# EAGLE board file-1764345413433-731153713 (EAGLE 9.7.0)
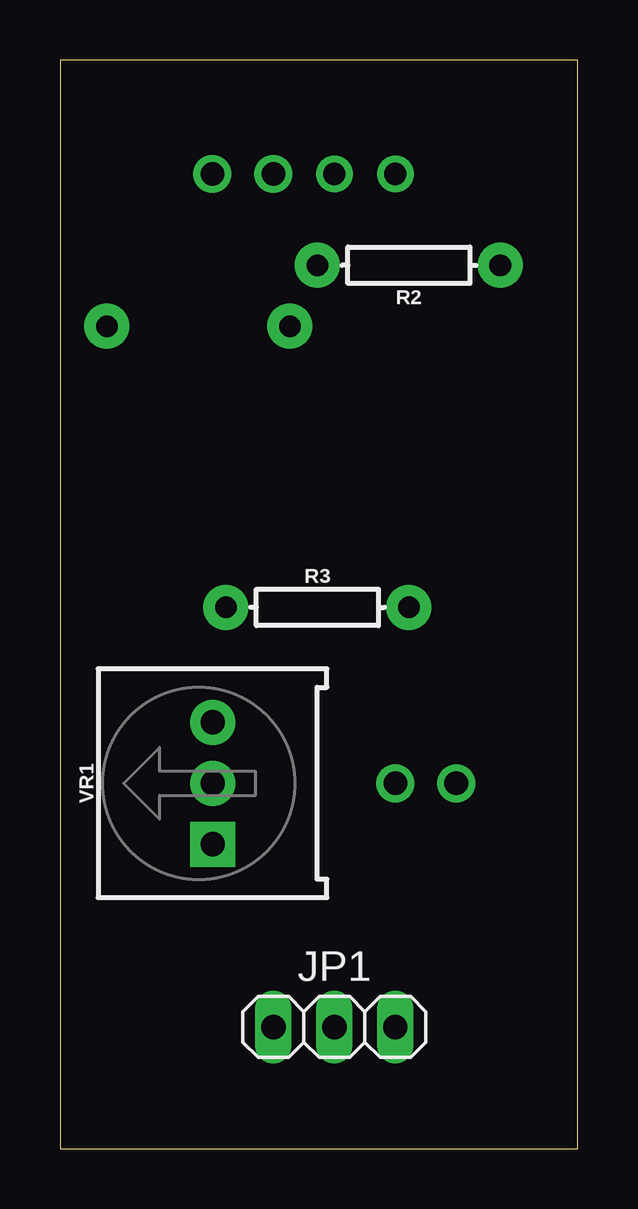
[diagram p0: board, top side]
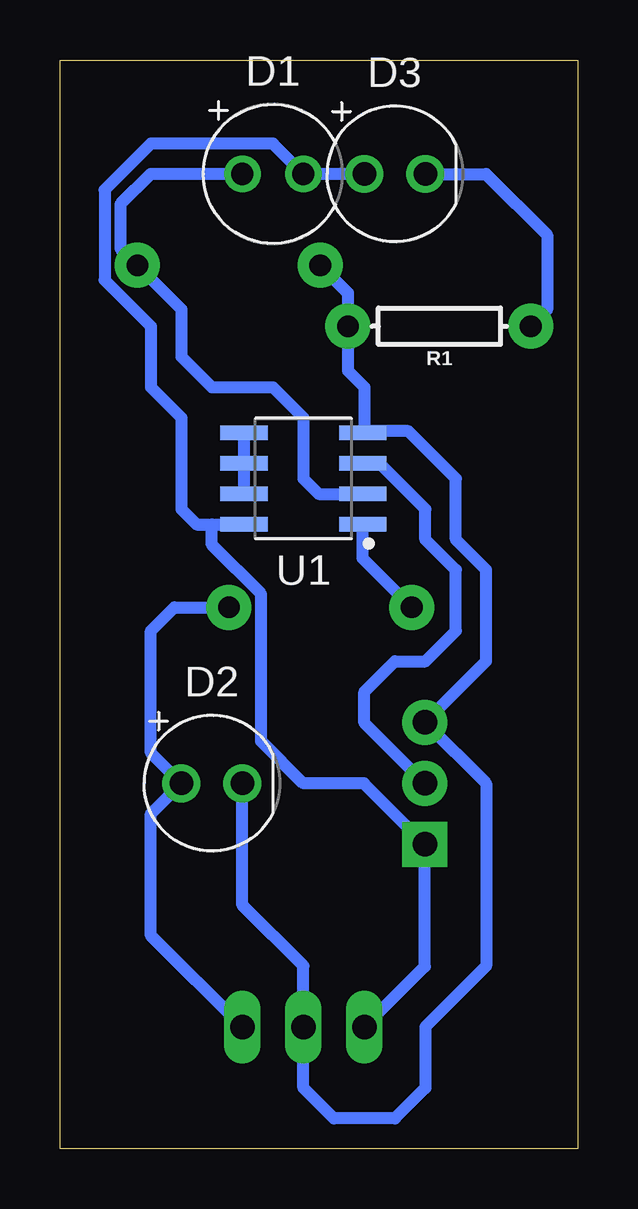
[diagram p1: board, bottom side, seen from below]

Size 21.57 x 45.39 mm. Coordinates in mm from the lower left corner, seen from the top.
Outline: 0,0 21.57,0 21.57,45.39 0,45.39 0,0
Copper layers (1*16): Top 0.035mm / dielectric 1.5mm / Bottom 0.035mm
Design rules "Fusion Electronics Design Rules": minimum track width 6mil, minimum drill 0.35mm, track to track 6mil, track to pad 6mil, pad to pad 6mil, via to via 6mil, smd to smd 6mil, copper to edge 40mil, drill to drill 6mil, minimum pad ring 10mil, minimum via ring 8mil, stop-mask expansion 4mil, vias tented up to drill 9999mil, thermal gap 10mil

## Footprints (pad centres in the part's own frame; a part is rotated, then mirrored left to right if it is on the bottom)
LEDRD254W51D580H541B = drill 0.921 pad 1.521: A -1.27,0; C 1.27,0
LEDRD254W60D565H860B_B = drill 0.981 pad 1.581: 1 -1.27,0; 2 1.27,0
1X03 = drill 1.016 long: 1 -2.54,0; 2 0,0; 3 2.54,0
AXIAL-0.3 = drill 0.9 pad 1.88: P$1 -3.81,0; P$2 3.81,0
SOIC127P600X175-8N = smd 1.969 x 0.592: 1 -2.474,1.905; 2 -2.474,0.635; 3 -2.474,-0.635; 4 -2.474,-1.905; 5 2.474,-1.905; 6 2.474,-0.635; 7 2.474,0.635; 8 2.474,1.905
TRIMPOT-PTH-3386U = drill 1.016 pad 1.88 square: 1 -2.54,-0.015 | drill 1.016 pad 1.88: 2 0,-0.015; 3 2.54,-0.015

## Placement (x,y rotation side)
D1  PHOTODIODE  [LEDRD254W51D580H541B]  12.7,40.64 0 bottom
D2  LED_BLUE  [LEDRD254W60D565H860B_B]  15.24,15.24 0 bottom
D3  IR_LED  [LEDRD254W60D565H860B_B]  7.62,40.64 0 bottom
JP1  PINHD-1X3  [1X03]  11.43,5.08 0 top
R1  10k  [AXIAL-0.3]  5.77,34.29 180 bottom
R2  10k  [AXIAL-0.3]  14.53,36.83 180 top
R3  10k  [AXIAL-0.3]  10.72,22.57 0 top
U1  LM358_SOIC  [SOIC127P600X175-8N]  11.43,27.94 180 bottom
VR1  10k  [TRIMPOT-PTH-3386U]  6.35,15.24 90 top

## Library data of the parts
D1 = Tinkercad
D2 D3 = Tinkercad; CATEGORY: Opto-Electronic; SUB-CATEGORY: LED
JP1 = Connector; CATEGORY: Connectors; DESCRIPTION: Header-Straight-3 Position; PACKAGE_TYPE: Through Hole; PITCH: 0.100" (2.54mm); SUBCATEGORY: Headers; TYPE: Male Pins
R1-R3 = SparkFun-Resistors; PROD_ID: RES-12184
U1 = IC_Linear; CATEGORY: Linear ICs; DESCRIPTION: General Purpose Amplifier 2 Circuit 8-SOIC Generic; PACKAGE_SIZE: 8-SOIC; PACKAGE_TYPE: Surface Mount; SERIES: LM358; SUBCATEGORY: Amplifiers; TYPE: General Purpose
VR1 = SparkFun-Resistors; PROD_ID: RES-09730; SF_SKU: COM-09806

## Nets
5V: D1.C D3.1 JP1.1 U1.8 VR1.1
GND: D2.2 JP1.2 R1.P$2 R2.P$2 U1.4 VR1.3
N$1: D3.2 R1.P$1
N$2: D1.A R2.P$1 U1.2
N$3: U1.3 VR1.2
N$4: R3.P$1 U1.1
N$5: D2.1 JP1.3 R3.P$2
N$6: U1.5 U1.6 U1.7

## Tracks (layer width: path | path; a pad name or v marks a point on that pad's centre or on a via)
5V
  Bottom 0.508: D3.1 D1.C 12.7,41.91 17.78,41.91 19.71,39.98 19.71,36.22 17.78,34.29 17.78,31.75 16.51,30.48 16.51,26.67 15.87,26.03 15.24,26.03 | 15.24,26.03 U1.8 | JP1.1 6.37,7.6 VR1.1 8.9,15.24 11.43,15.24 13.19,17 13.19,23.13 15.24,25.18 15.24,26.03
GND
  Bottom 0.508: R2.P$2 9.58,35.68 R1.P$2 9.58,32.44 8.89,31.75 8.89,29.91 | 8.89,29.91 U1.4 | D2.2 13.97,10.16 11.43,7.62 JP1.2 11.43,2.54 10.16,1.27 7.62,1.27 6.35,2.54 6.35,5.08 3.81,7.62 3.81,15.22 VR1.3 3.81,20.33 3.81,24.13 5.08,25.4 5.08,27.94 7.05,29.91 8.89,29.91
N$1
  Bottom 0.508: D3.2 3.81,40.64 1.27,38.1 1.27,34.98 R1.P$1
N$2
  Bottom 0.508: D1.A 17.78,40.64 19.05,39.37 19.05,37.54 R2.P$1 16.51,35 16.51,33.02 15.24,31.75 12.7,31.75 11.43,30.48 11.43,27.94 10.79,27.3 U1.2
N$3
  Bottom 0.508: VR1.2 8.89,17.77 8.89,19.05 7.62,20.32 6.35,20.32 5.08,21.59 5.08,24.13 6.35,25.4 6.35,26.67 8.25,28.58 U1.3
N$4
  Bottom 0.508: R3.P$1 8.96,24.61 U1.1
N$5
  Bottom 0.508: JP1.3 17.78,8.89 17.78,13.97 D2.1 17.78,16.51 17.78,21.59 16.8,22.57 R3.P$2
N$6
  Bottom 0.508: U1.5 U1.6 U1.7